# Altium PCB 3KW-139_V1.2_铝基板_整流.PcbDoc
Units mm, origin at the board's own origin, x right, y up, seen from the top; angles counter-clockwise.
Board outline 53.98 x 46.5 mm, 2 copper layers (Top Layer, Bottom Layer); 6 components, 17 nets, 0 pads, 0 vias.
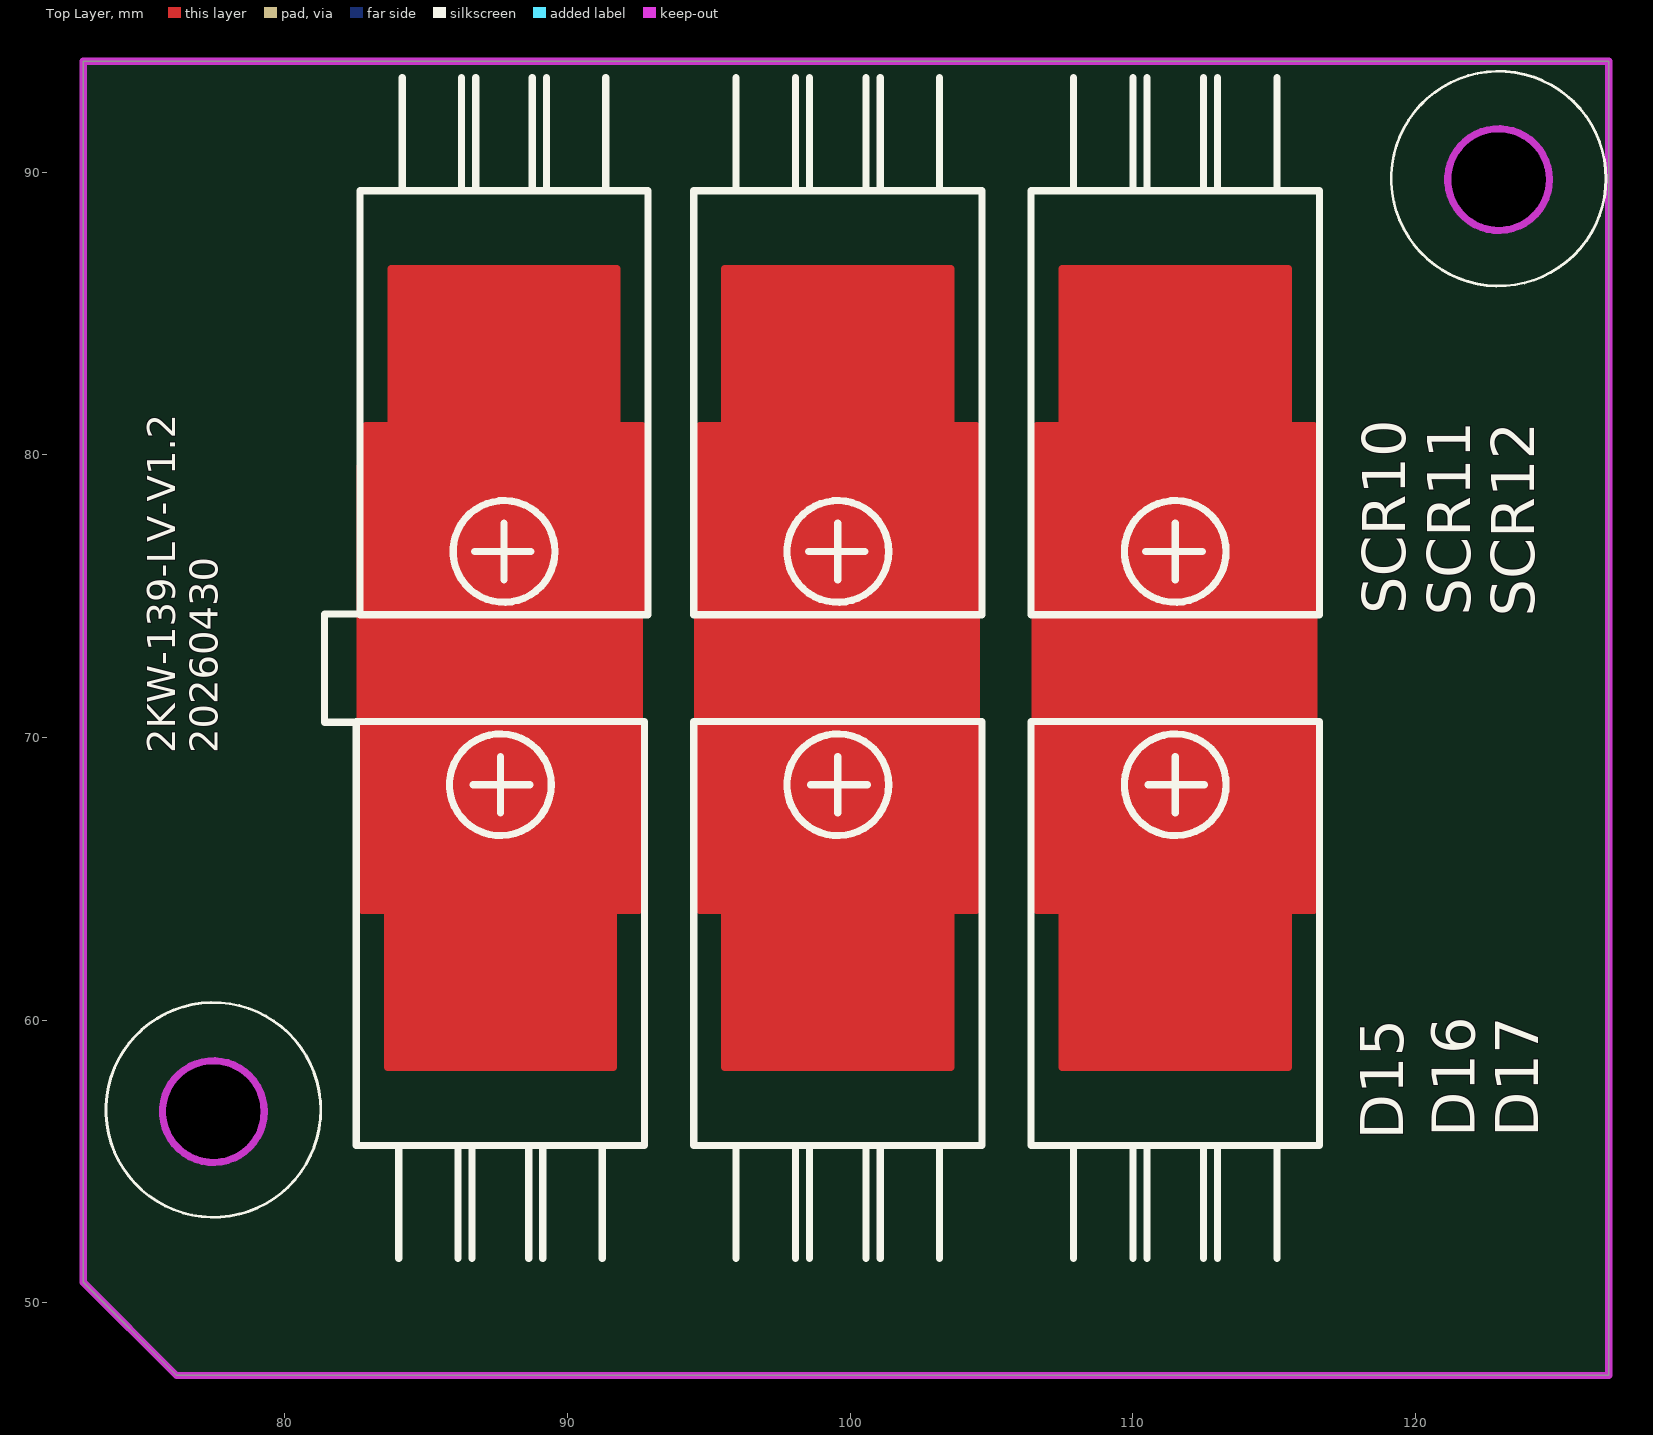
[diagram p0: Top Layer view]
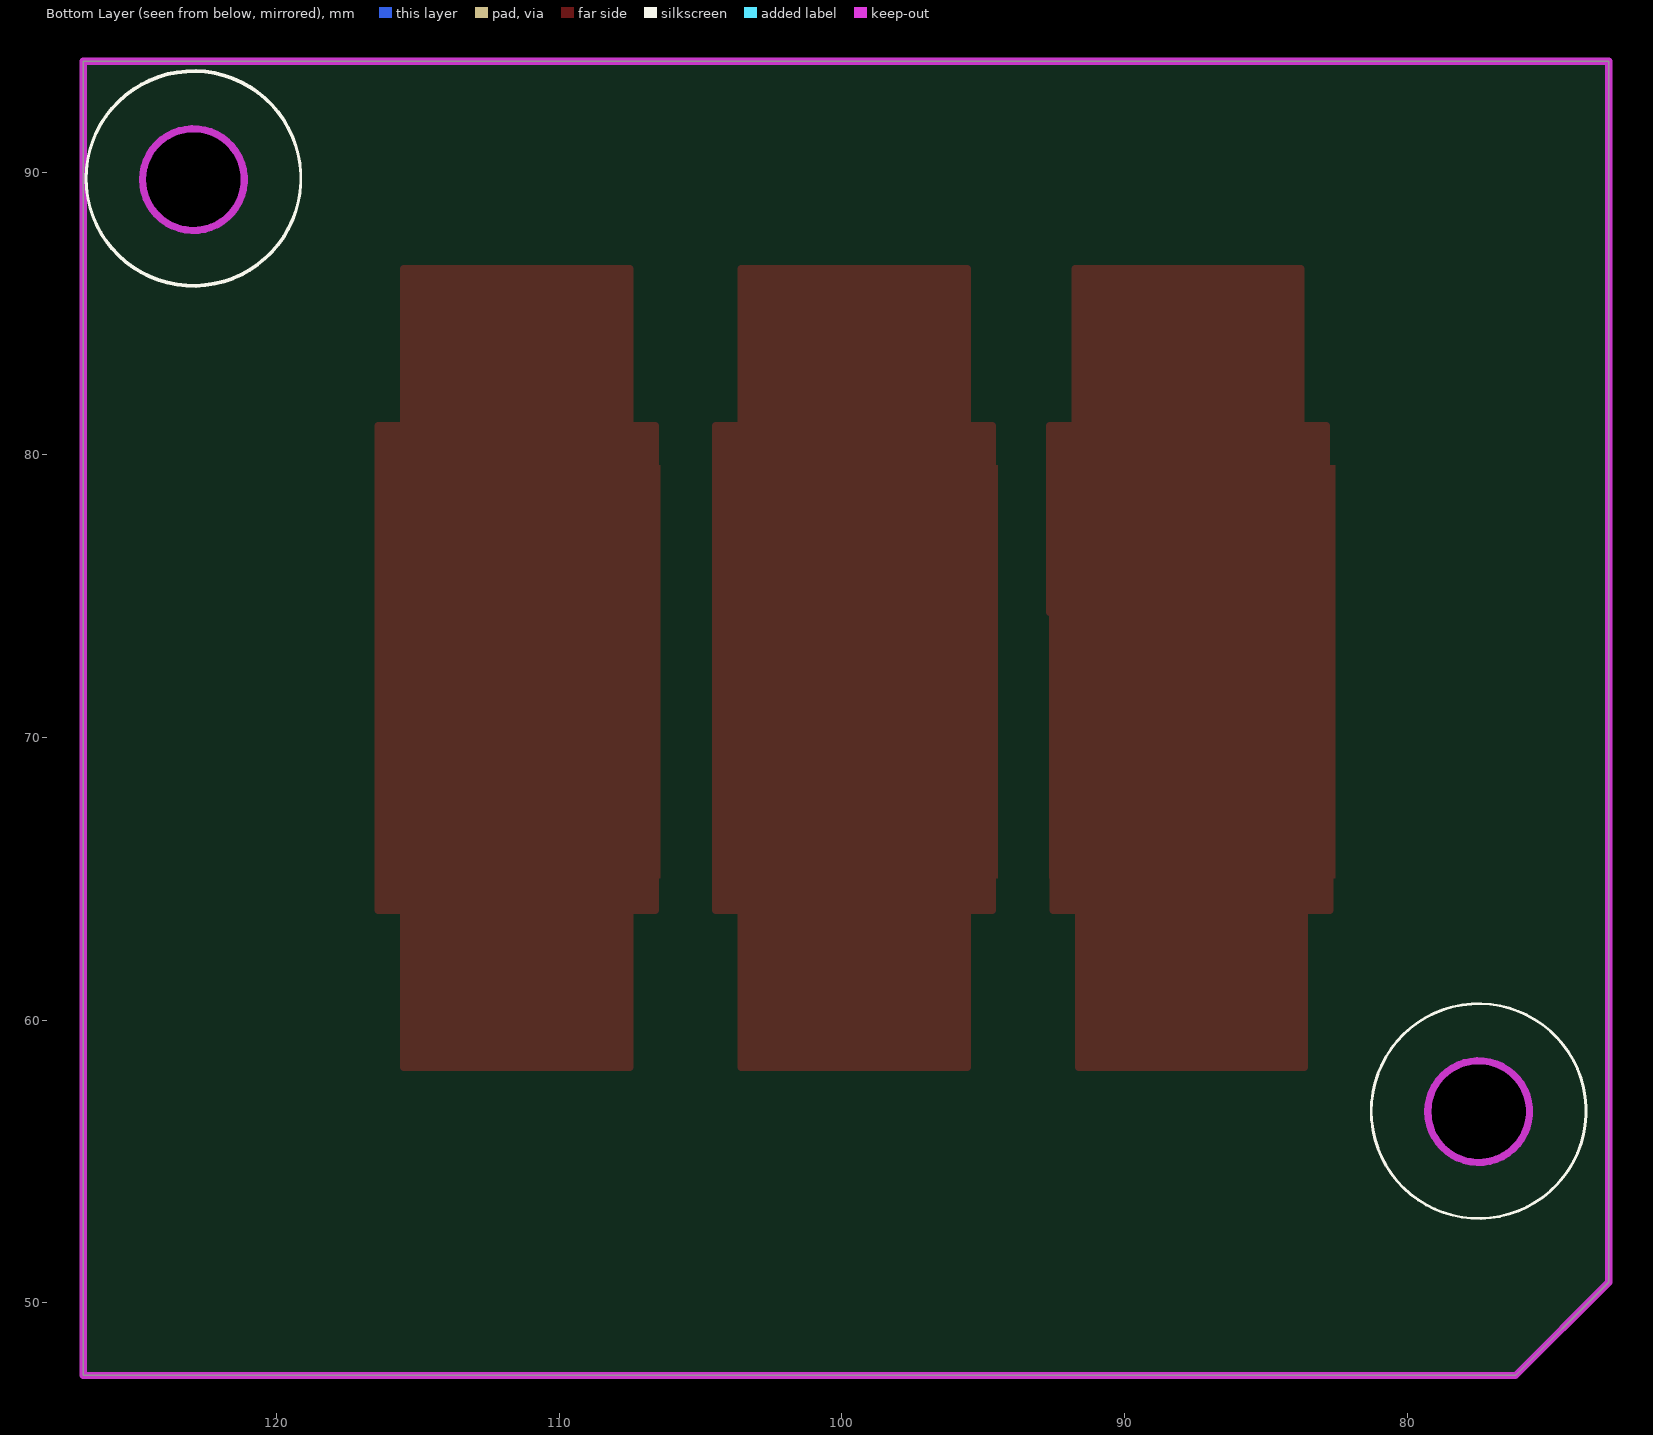
[diagram p1: Bottom Layer view, seen from below]

## Layer stack, top to bottom
Top Solder: solder mask 0.0102, Solder Resist, Dk 3.5
Top Layer: signal copper 0.0356
Dielectric 1: dielectric 0.32, FR-4, Dk 4.8
Bottom Layer: signal copper 0.0356
Bottom Solder: solder mask 0.0102, Solder Resist, Dk 3.5

## Board outline
72.872,50.726 76.172,47.426 126.845,47.426 126.845,57.692 126.845,93.926 72.87,93.926
cut-out: 121.147,89.739 ccw(c122.947,89.739) 122.947,87.939 ccw(c122.947,89.739) 124.747,89.739 ccw(c122.947,89.739) 122.947,91.539 ccw(c122.947,89.739)
cut-out: 75.674,56.763 ccw(c77.474,56.763) 77.474,54.963 ccw(c77.474,56.763) 79.274,56.763 ccw(c77.474,56.763) 77.474,58.563 ccw(c77.474,56.763)

## Design rules (kind name [scope] priority, off if disabled: settings)
Clearance [All] p1: gap=0.254 ignorepadtopadclearanceinfootprint=FALSE except(0: Arc-Hole Track-Hole SMDPad-Hole THPad-Hole Via-Hole Fill-Hole Poly-Hole Region-Hole Text-Hole)
PolygonConnect [All] p1: connectstyle=Relief reliefconductorwidth=0.254 reliefentries=4 polygonreliefangle="90 Angle" airgapwidth=0.254
RoutingVias [All] p1: holewidth=0.711 width=1.27 viastyle="Through Hole" minholewidth=0.711 minwidth=1.27 maxholewidth=0.711 maxwidth=1.27
SolderMaskExpansion [All] p1: expansion=0.102
Width [All] p1: maxlimit=0.254 minlimit=0.254 preferedwidth=0.254
30 further rules are at their usual default settings.

## Components (designator, comment, footprint, x,y, rotation, side; value= is the part's Value field where it differs from the comment)
D15 "Comment" "TO220TP - duplicate" 87.63,68.326 r0 top locked
D16 "Comment" "TO220TP - duplicate" 99.568,68.326 r0 top locked
D17 "Comment" "TO220TP - duplicate" 111.506,68.326 r0 top locked
SCR10 "Comment" "TO220TP - duplicate" 87.757,76.581 r180 top locked
SCR11 "Comment" "TO220TP - duplicate" 99.568,76.581 r180 top locked
SCR12 "Comment" "TO220TP - duplicate" 111.506,76.581 r180 top locked

## Footprints (in the part's own frame and the unit in brackets; to place one, negate y for a bottom-side part, rotate by r counter-clockwise, add the part's x,y. Pads: shape width x height; smd on the part's side, far side on the other; paste and mask are expansions set on the pad)
"TO220TP - duplicate" [mm]
  Top Layer circle w0.254: c0,0 r2
  Top Layer region: -4.9,2.159 -4.9,-4.45 -4,-4.45 -4,-9.906 4,-10 4,-4.45 4.9,-4.45 4.9,2.159 0.254,2.159 0.762,1.905 1.651,1.27 2.032,0.381 1.905,-0.762 1.143,-1.651 0.381,-2.032 -0.381,-2.032 -1.016,-1.778 -1.524,-1.397 -1.905,-0.635 -2.032,0.127 -1.778,0.889 -1.143,1.651 -0.381,2.032 -0.381,2.159
  Top Layer lines w0.254: -4.9,-4.45 -4,-4.45 -4,-10 4,-10 4,-4.45 4.9,-4.45 4.9,2.159 -4.9,2.159 -4.9,-4.45
  silkscreen extent -5.1,-16.76 5.1,2.24

## Nets (pads, with @x,y where several pads share a name; then routed paths per layer and width w, separated by ;. In a path a pad name is that pad's centre, name@x,y a point inside that pad or via, vN(x,y) a via of type N, cw(c..) or ccw(c..) an arc to the next point about the centre after c; other vN are vias at no path point)
10VAC+: 
10VAC-: 
DR_UA: 
DR_UB: 
DR_UC: 
GND-1: 
NetC62_2: 
NetC63_2: 
NetC64_2: 
NetC66_1: 
NetC67_1: 
NetC68_1: 
NetQ15_2: 
U_BUS: 
UA: 
UB: 
UC: 

## Keep-outs
Keep-Out Layer:
  circle w0.254: c122.947,89.739 r1.8
  circle w0.254: c77.474,56.763 r1.8
  lines w0.254: 72.87,50.726 72.87,93.926 126.845,93.926 126.845,57.692 126.845,47.426 116.579,47.426 76.172,47.426 72.872,50.726

## Other copper
Top Layer:
  region: 106.426,79.634 116.533,79.634 116.533,65.021 106.426,65.026
  region: 94.488,79.634 104.595,79.634 104.595,65.021 94.488,65.026
  region: 82.55,79.634 92.657,79.634 92.657,65.021 82.55,65.026

## Silkscreen, mask and mechanical layers (free items; w line width, h text height)
Top Overlay:
  circle w0.1: c122.948,89.773 r3.8
  circle w0.1: c77.474,56.824 r3.8
  lines w0.254: 82.508,70.54 81.407,70.54 81.407,74.367 82.552,74.367
  text "2KW-139-LV-V1.2 / 20260430" at 77.63,69.447 h1 r90
  text "注意：TO-220封装和实际元器件成型折弯的长度不一致。 / 实际折弯长度:2.8mm（元件折弯脚距离塑封）(整流1.5~2mm;IGBT:4.5~5mm)" at 72.183,38.423 h2
Bottom Overlay:
  circle w0.1: c122.945,89.801 r3.8
  circle w0.1: c122.945,89.758 r3.8
  circle w0.1: c122.945,89.769 r3.8
  circle w0.1: c77.474,56.781 r3.8
Mechanical 1:
  circle w0.1: c77.474,56.792 r3.8